# Altium PCB AVR精简学习板.PcbDoc (part 1 of 10)
Units mm, origin at the board's own origin, x right, y up, seen from the top; angles counter-clockwise.
Board outline 152.4 x 101.6 mm, 2 copper layers (Top Layer, Bottom Layer); 44 components, 51 nets, 211 pads, 6 vias.
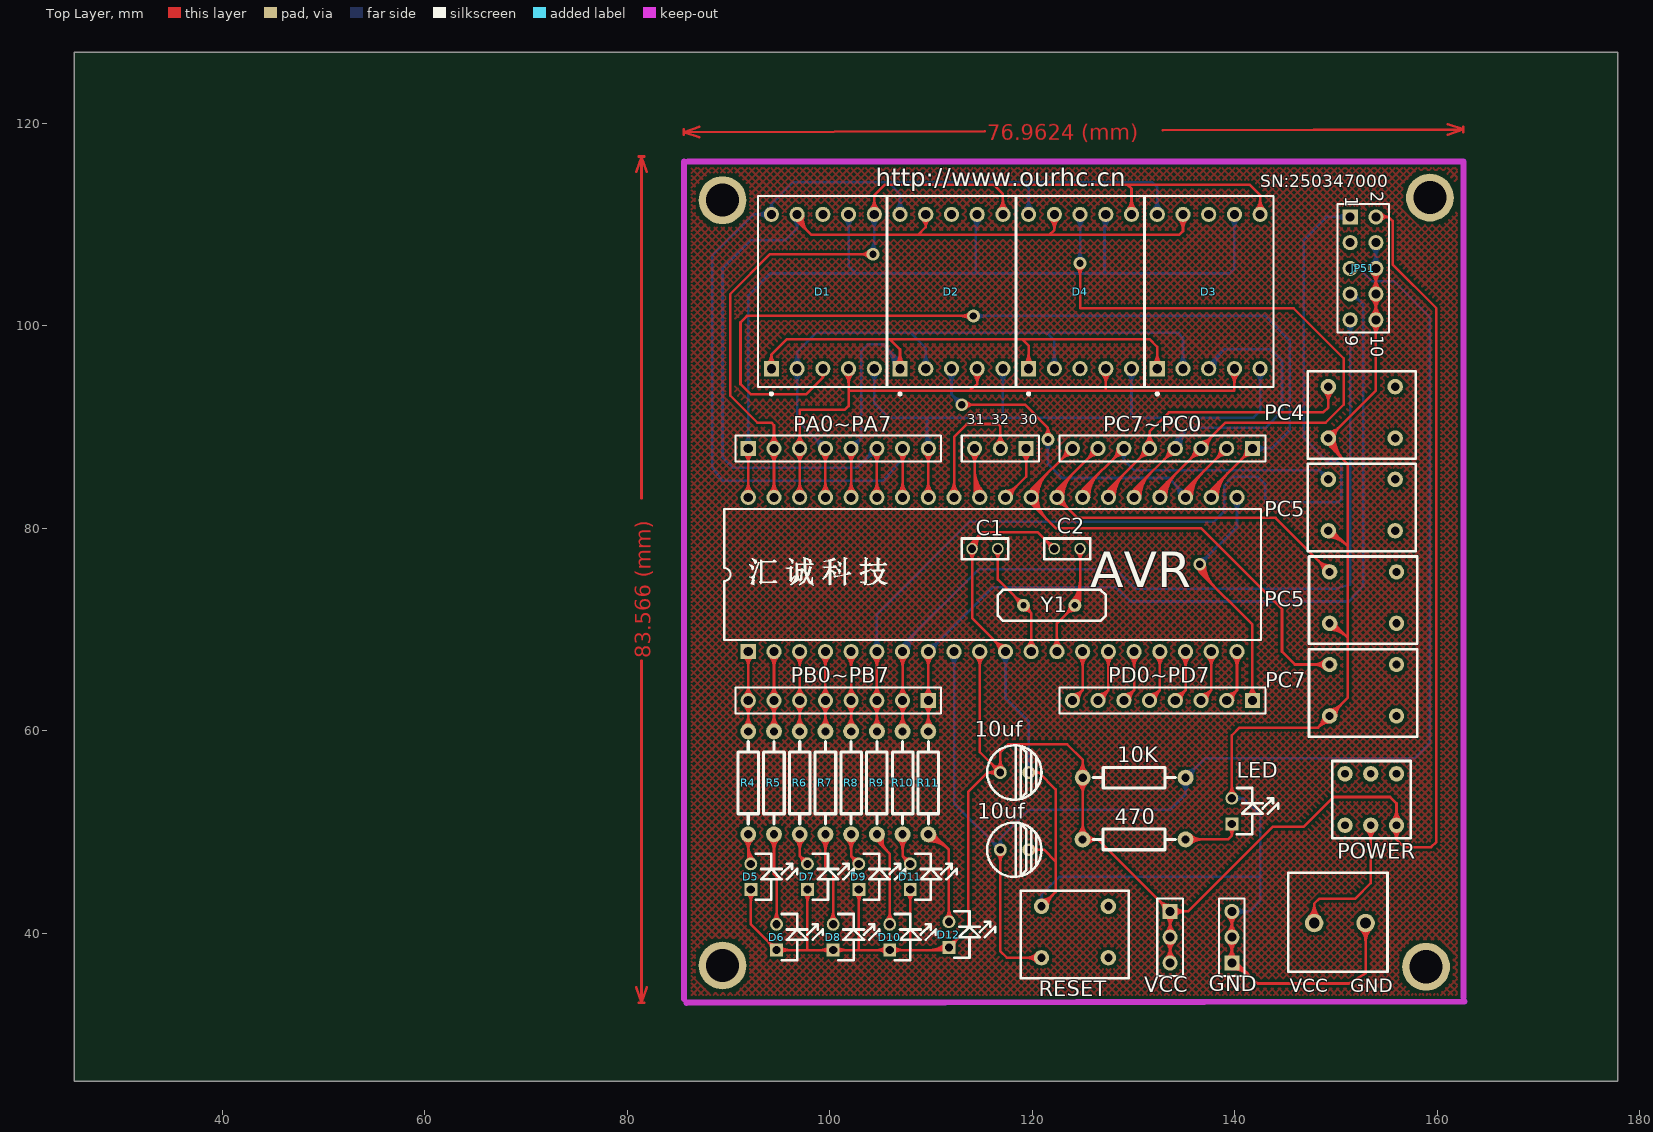
[diagram p0: Top Layer view]
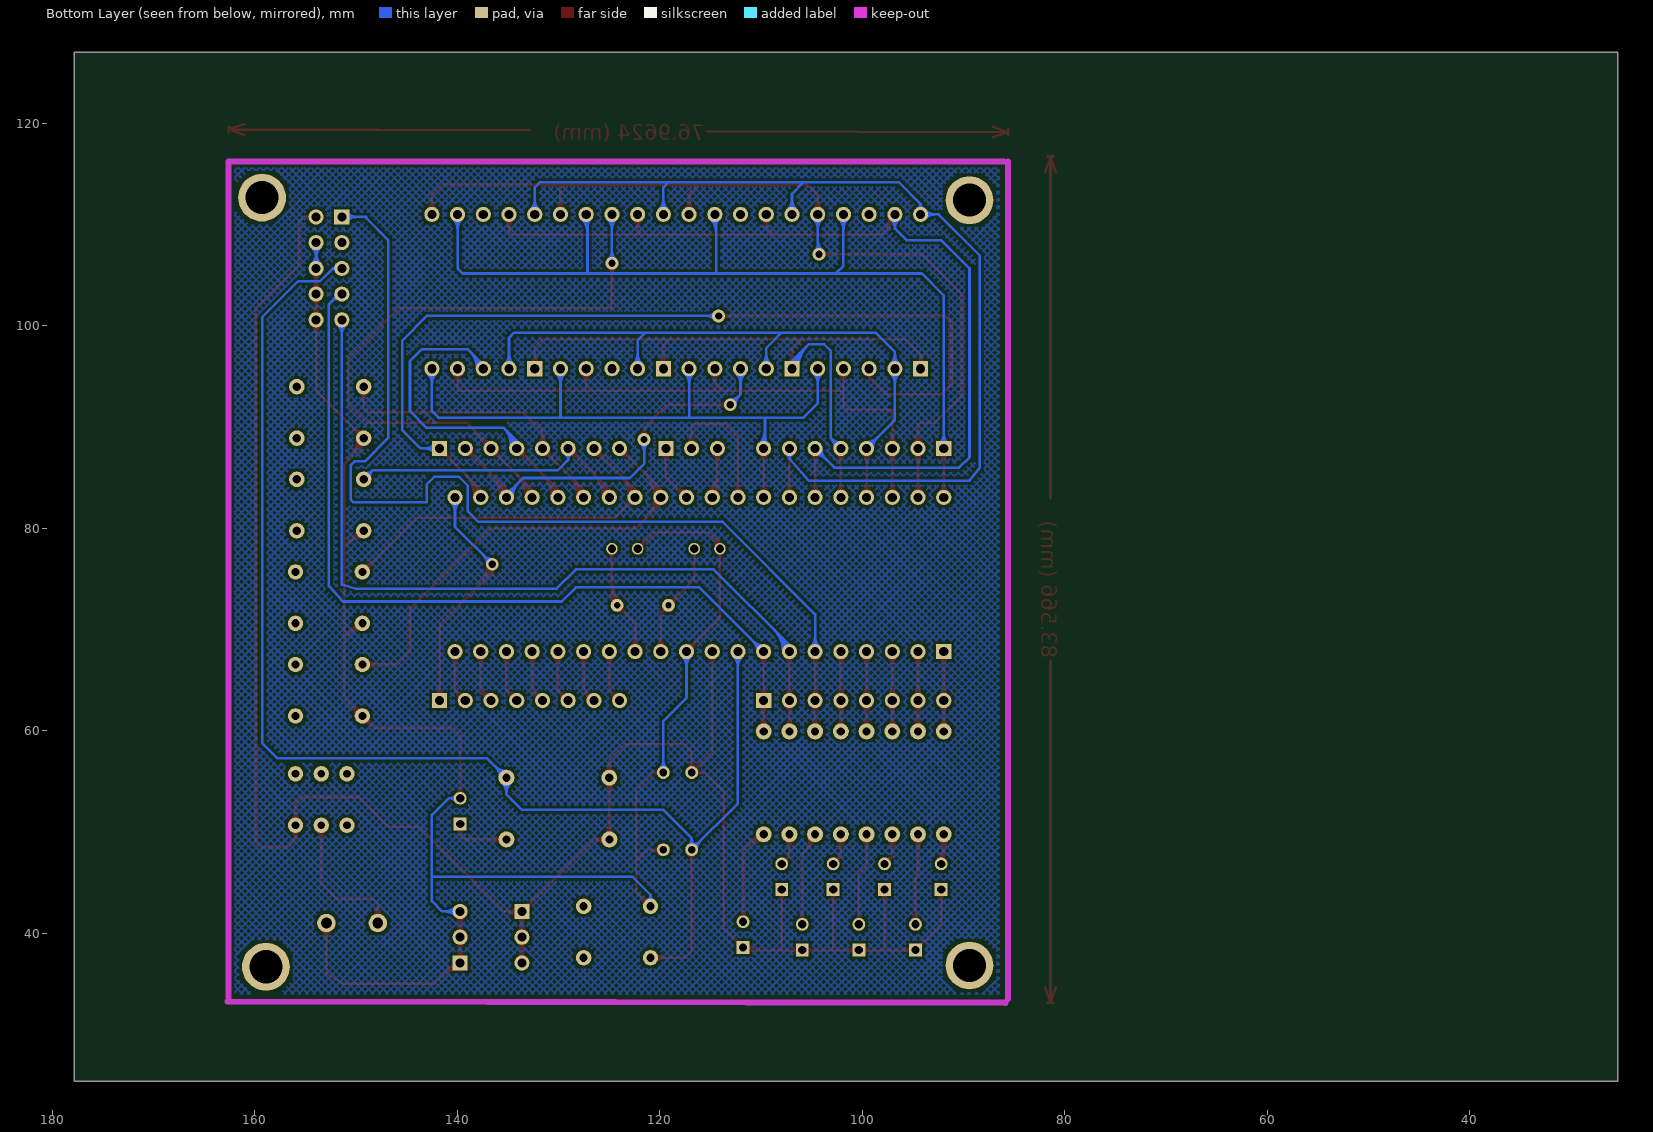
[diagram p1: Bottom Layer view, seen from below]

## Layer stack, top to bottom
Top Layer: signal copper 0.0356
Dielectric: dielectric 0.32, FR-4, Dk 4.8
Bottom Layer: signal copper 0.0356

## Board outline
25.4,25.4 177.8,25.4 177.8,127 25.4,127

## Design rules (kind name [scope] priority, off if disabled: settings)
Clearance [All] p1: gap=0.254
ComponentClearance [All] p1: gap=0.254 collisioncheckmode=0 verticalgap=0.254
PolygonConnect [All] p1: connectstyle=Relief reliefconductorwidth=0.254 reliefentries=4 polygonreliefangle="90 Angle"
RoutingVias [All] p1: holewidth=0.711 width=1.27 viastyle="Through Hole" minholewidth=0.711 minwidth=1.27 maxholewidth=0.711 maxwidth=1.27
SolderMaskExpansion [All] p1: expansion=0.102
TestPointUsage [All] p1: valid=0 allowmultiple=FALSE
Testpoint [All] p1: side=15 testpointundercomponent=TRUE minsize=1.016 maxsize=2.54 preferedsize=1.524 minholesize=0 maxholesize=1.016 preferedholesize=0.813 testpointgrid=0.025 style=1023 order=0-112345678
Width [All] p1: maxlimit=0.254 minlimit=0.254 preferedwidth=0.254
17 further rules are at their usual default settings.

## Classes and differential pairs
component class shumaguan: 10uf 10Uf C1 C2 D1 D2 D3 D4 D5 D6 D7 D8 D9 D10 D11 D12 PC4 PC5 PC7 POWER RESET

## Components (designator, comment, footprint, x,y, rotation, side; value= is the part's Value field where it differs from the comment)
10K "8.2k" AXIAL0.4 135.128,55.372 r180 top (schematic designator R3)
10uf "360u\15v" cap2 112.268,55.88 r0 top (schematic designator C7)
10uf "1uf" cap2 112.268,48.26 r0 top (schematic designator C?)
470 "470" AXIAL0.4 124.968,49.276 r0 top (schematic designator R1)
AVR "ATmega16-16PC" 40P6 116.078,75.438 r0 top (schematic designator U1)
C1 "15p" RAD0.3 117.094,77.978 r180 top
C2 "15p" RAD0.3 121.666,77.978 r0 top
D1 "3" LEDDIP-10/C15.24 99.314,103.378 r0 top
D2 "Dpy Blue-CC" LEDDIP-10/C15.24 112.014,103.378 r0 top
D3 "Dpy Blue-CC" LEDDIP-10/C15.24 137.414,103.378 r0 top
D4 "Dpy Blue-CC" LEDDIP-10/C15.24 124.714,103.378 r0 top
D5 "LED" LED 92.71,46.355 r270 top
D6 "LED" LED 95.25,40.386 r270 top
D7 "LED" LED 98.298,46.355 r270 top
D8 "LED" LED 100.838,40.386 r270 top
D9 "LED" LED 103.378,46.355 r270 top
D10 "LED" LED 106.426,40.386 r270 top
D11 "LED" LED 108.458,46.355 r270 top
D12 "LED" LED 112.268,40.64 r270 top
GND "GND" HDR1X3 139.7,37.084 r90 top (schematic designator JP12)
JP1 "Header 3" HDR1X3 119.38,87.884 r180 top
JP51 "download" HDR2X5 151.384,110.744 r270 top
LED "LED" LED 140.208,52.832 r270 top
PA0~PA7 "Header 8" HDR1X8 91.948,87.884 r0 top (schematic designator JP5)
PB0~PB7 "Header 8" HDR1X8 109.728,62.992 r180 top (schematic designator JP2)
PC4 "KEY" KEY-1 149.225,93.98 r0 top (schematic designator 1)
PC5 "2" KEY-1 149.225,84.836 r0 top (schematic designator 2)
PC5 "KEY" KEY-1 149.352,75.692 r0 top (schematic designator 3)
PC7 "KEY" KEY-1 149.352,66.548 r0 top (schematic designator 4)
PC7~PC0 "Header 8" HDR1X8 141.732,87.884 r180 top (schematic designator JP6)
PD0~PD7 "Header 8" HDR1X8 141.732,62.992 r180 top (schematic designator JP3)
POWER "power" PCBComponent_1 152.4,41.656 r0 top (schematic designator 11)
R4 "470" AXIAL0.4 91.948,49.784 r90 top
R5 "8.2k" AXIAL0.4 94.488,49.784 r90 top
R6 "8.2k" AXIAL0.4 97.028,49.784 r90 top
R7 "8.2k" AXIAL0.4 99.568,49.784 r90 top
R8 "8.2k" AXIAL0.4 102.108,49.784 r90 top
R9 "8.2k" AXIAL0.4 104.648,49.784 r90 top
R10 "8.2k" AXIAL0.4 107.188,49.784 r90 top
R11 "8.2k" AXIAL0.4 109.728,49.784 r90 top
RESET "KEY" KEY-1 120.904,42.672 r0 top (schematic designator 5)
RT "KEY-33" key 153.416,56.388 r90 top
VCC "VCC" HDR1X3 133.604,42.164 r270 top (schematic designator JP11)
Y1 "12M" CRYSTAL 121.666,71.374 r180 top

## Footprints (in the part's own frame and the unit in brackets; to place one, negate y for a bottom-side part, rotate by r counter-clockwise, add the part's x,y. Pads: shape width x height; smd on the part's side, far side on the other; paste and mask are expansions set on the pad)
40P6 [mm] "DIP; 40 Leads; Row Spacing 15.24 mm; Pitch 2.54 mm"
  rect 1.5x1.5 hole 0.9: 1(-24.13,-7.62)
  round 1.5 hole 0.9: 2(-21.59,-7.62) 3(-19.05,-7.62) 4(-16.51,-7.62) 5(-13.97,-7.62) 6(-11.43,-7.62) 7(-8.89,-7.62) 8(-6.35,-7.62) 9(-3.81,-7.62) 10(-1.27,-7.62) 11(1.27,-7.62) 12(3.81,-7.62) 13(6.35,-7.62) 14(8.89,-7.62) 15(11.43,-7.62) 16(13.97,-7.62) 17(16.51,-7.62) 18(19.05,-7.62) 19(21.59,-7.62) 20(24.13,-7.62) 21(24.13,7.62) 22(21.59,7.62) 23(19.05,7.62) 24(16.51,7.62) 25(13.97,7.62) 26(11.43,7.62) 27(8.89,7.62) 28(6.35,7.62) 29(3.81,7.62) 30(1.27,7.62) 31(-1.27,7.62) 32(-3.81,7.62) 33(-6.35,7.62) 34(-8.89,7.62) 35(-11.43,7.62) 36(-13.97,7.62) 37(-16.51,7.62) 38(-19.05,7.62) 39(-21.59,7.62) 40(-24.13,7.62)
  silkscreen extent -26.5,-6.45 26.5,6.45
AXIAL0.4 [mil]
  round 62 hole 32: 1(-0.15,-0.04) 2(399.85,-0.04)
  silkscreen extent 40,-40 360,40
cap2 [mil]
  round 50 hole 30: 1(180,0) 2(290,0)
  silkscreen extent 129,-106 340,106
CRYSTAL [mil] "CRYSTAL"
  round 50 hole 25: 1(-100,-40) 2(100,-40)
  silkscreen extent -220,-100 200,20
HDR1X3 [mm] "Connector; Header; 3 Position"
  rect 1.5x1.5 hole 0.9: 1(0,0)
  round 1.5 hole 0.9: 2(2.54,0) 3(5.08,0)
  silkscreen extent -1.27,-1.27 6.35,1.27
HDR1X8 [mm] "Connector; Header; 8 Position"
  rect 1.5x1.5 hole 0.9: 1(0,0)
  round 1.5 hole 0.9: 2(2.54,0) 3(5.08,0) 4(7.62,0) 5(10.16,0) 6(12.7,0) 7(15.24,0) 8(17.78,0)
  silkscreen extent -1.27,-1.27 19.05,1.27
HDR2X5 [mm] "Connector; Header; 5x2 Position"
  rect 1.5x1.5 hole 0.9: 1(0,0)
  round 1.5 hole 0.9: 2(0,2.54) 3(2.54,0) 4(2.54,2.54) 5(5.08,0) 6(5.08,2.54) 7(7.62,0) 8(7.62,2.54) 9(10.16,0) 10(10.16,2.54)
  silkscreen extent -1.27,-1.27 11.43,3.81
key [mil]
  round 60 hole 30: 0(-225,100) 1(-225,0) 2(-225,-100) 3(-25,-100) 4(-25,0) 5(-25,100)
  silkscreen extent -275,-155 25,150
KEY-1 [mil] "KEY"
  round 60 hole 32: 0(0,0) 1(260,0) 2(0,-200) 3(260,-200)
  silkscreen extent -80,-280 340,60
LED [mil]
  rect 50x50 hole 32: 1(80,-20)
  round 50 hole 32: 2(-20,-20)
  silkscreen extent -60,0 120,160
LEDDIP-10/C15.24 [mm]
  rect 1.5x1.5 hole 0.9: 1(-5.08,-7.62)
  round 1.5 hole 0.9: 2(-2.54,-7.62) 3(0,-7.62) 4(2.54,-7.62) 5(5.08,-7.62) 6(5.08,7.62) 7(2.54,7.62) 8(0,7.62) 9(-2.54,7.62) 10(-5.08,7.62)
  silkscreen extent -6.4,-10.22 6.4,9.45
PCBComponent_1 [mil]
  round 71.81 hole 41.81: 1(-180,-25) 2(20,-25)
  silkscreen extent -280,-215 105,170
RAD0.3 [mil]
  round 45 hole 32: 1(20,0) 2(120,0)
  silkscreen extent -20,-40 160,40

## Part data
10K 470 R4 R5 R6 R7 R8 R9 R10 R11: library part RES2
10uf 10uf: library part "CAPACITOR POL", "Capacitor"
AVR: "8-Bit AVR Microcontroller with 16K Bytes of In-System Programmable Flash Memory"
C1 C2: library part CAP, "Capacitor"
D1: library part "Dpy Blue-CC", "14.2 mm General Purpose Blue 7-Segment Display: CC, RH DP, Gray Surface"
D2 D3 D4: "14.2 mm General Purpose Blue 7-Segment Display: CC, RH DP, Gray Surface"
GND VCC: library part "Header 3", "Header, 3-Pin"
JP1: "Header, 3-Pin"
JP51: library part "Header 5X2", "Header, 5-Pin, Dual row"
PA0~PA7 PB0~PB7 PC7~PC0 PD0~PD7: "Header, 8-Pin"
PC5: library part KEY, "KEY"
Y1: library part CRYSTAL, "Crystal"

## Free pads (board coordinates)
  round 4.72 hole 3.267: 0(89.408,112.395) 1(89.408,36.83) 2(159.258,112.649) 3(158.877,36.703)

## Via types
v1: diameter 1.27, hole 0.711, Top Layer to Bottom Layer, 6 vias

## Nets (pads, with @x,y where several pads share a name; then routed paths per layer and width w, separated by ;. In a path a pad name is that pad's centre, name@x,y a point inside that pad or via, vN(x,y) a via of type N, cw(c..) or ccw(c..) an arc to the next point about the centre after c; other vN are vias at no path point)
D0: AVR.40 D1.7 D2.7 D3.7 D4.7 PA0~PA7.1 | length 271.7
  Top Layer w0.254: AVR.40@91.948,83.058 PA0~PA7.1@91.948,87.884 ; AVR.40@91.507,83.499 ccw(c90.444,84.562) 91.948,84.562 ; AVR.40@91.507,83.499 ccw(c90.444,84.562) 91.948,84.562 ; AVR.40@91.507,83.499 ccw(c90.444,84.562) 91.948,84.562 ; AVR.40@91.507,83.499 ccw(c90.444,84.562) 91.948,84.562 ; AVR.40@91.507,83.499 ccw(c90.444,84.562) 91.948,84.562 ; AVR.40@91.507,83.499 ccw(c90.444,84.562) 91.948,84.562 ; AVR.40@91.507,83.499 ccw(c90.444,84.562) 91.948,84.562 ; PA0~PA7.1@91.507,87.443 cw(c90.444,86.38) 91.948,86.38 ; PA0~PA7.1@91.507,87.443 cw(c90.444,86.38) 91.948,86.38 ; PA0~PA7.1@91.507,87.443 cw(c90.444,86.38) 91.948,86.38 ; PA0~PA7.1@91.507,87.443 cw(c90.444,86.38) 91.948,86.38 ; PA0~PA7.1@91.507,87.443 cw(c90.444,86.38) 91.948,86.38 ; PA0~PA7.1@91.507,87.443 cw(c90.444,86.38) 91.948,86.38 ; PA0~PA7.1@91.507,87.443 cw(c90.444,86.38) 91.948,86.38 ; AVR.40@91.687,83.319 ccw(c91.057,83.949) 91.948,83.949 ; AVR.40@91.687,83.319 ccw(c91.057,83.949) 91.948,83.949 ; AVR.40@91.687,83.319 ccw(c91.057,83.949) 91.948,83.949 ; AVR.40@91.687,83.319 ccw(c91.057,83.949) 91.948,83.949 ; AVR.40@91.687,83.319 ccw(c91.057,83.949) 91.948,83.949 ; AVR.40@91.687,83.319 ccw(c91.057,83.949) 91.948,83.949 ; AVR.40@91.687,83.319 ccw(c91.057,83.949) 91.948,83.949 ; PA0~PA7.1@91.687,87.623 cw(c91.057,86.993) 91.948,86.993 ; PA0~PA7.1@91.687,87.623 cw(c91.057,86.993) 91.948,86.993 ; PA0~PA7.1@91.687,87.623 cw(c91.057,86.993) 91.948,86.993 ; PA0~PA7.1@91.687,87.623 cw(c91.057,86.993) 91.948,86.993 ; PA0~PA7.1@91.687,87.623 cw(c91.057,86.993) 91.948,86.993 ; PA0~PA7.1@91.687,87.623 cw(c91.057,86.993) 91.948,86.993 ; PA0~PA7.1@91.687,87.623 cw(c91.057,86.993) 91.948,86.993 ; 91.948,83.949 ccw(c92.839,83.949) AVR.40@92.209,83.319 ; 91.948,83.949 ccw(c92.839,83.949) AVR.40@92.209,83.319 ; 91.948,83.949 ccw(c92.839,83.949) AVR.40@92.209,83.319 ; 91.948,83.949 ccw(c92.839,83.949) AVR.40@92.209,83.319 ; 91.948,83.949 ccw(c92.839,83.949) AVR.40@92.209,83.319 ; 91.948,83.949 ccw(c92.839,83.949) AVR.40@92.209,83.319 ; 91.948,83.949 ccw(c92.839,83.949) AVR.40@92.209,83.319 ; 91.948,84.562 ccw(c93.452,84.562) AVR.40@92.389,83.499 ; 91.948,84.562 ccw(c93.452,84.562) AVR.40@92.389,83.499 ; 91.948,84.562 ccw(c93.452,84.562) AVR.40@92.389,83.499 ; 91.948,84.562 ccw(c93.452,84.562) AVR.40@92.389,83.499 ; 91.948,84.562 ccw(c93.452,84.562) AVR.40@92.389,83.499 ; 91.948,84.562 ccw(c93.452,84.562) AVR.40@92.389,83.499 ; 91.948,84.562 ccw(c93.452,84.562) AVR.40@92.389,83.499 ; 91.948,86.38 cw(c93.452,86.38) PA0~PA7.1@92.389,87.443 ; 91.948,86.38 cw(c93.452,86.38) PA0~PA7.1@92.389,87.443 ; 91.948,86.38 cw(c93.452,86.38) PA0~PA7.1@92.389,87.443 ; 91.948,86.38 cw(c93.452,86.38) PA0~PA7.1@92.389,87.443 ; 91.948,86.38 cw(c93.452,86.38) PA0~PA7.1@92.389,87.443 ; 91.948,86.38 cw(c93.452,86.38) PA0~PA7.1@92.389,87.443 ; 91.948,86.38 cw(c93.452,86.38) PA0~PA7.1@92.389,87.443 ; 91.948,86.993 cw(c92.839,86.993) PA0~PA7.1@92.209,87.623 ; 91.948,86.993 cw(c92.839,86.993) PA0~PA7.1@92.209,87.623 ; 91.948,86.993 cw(c92.839,86.993) PA0~PA7.1@92.209,87.623 ; 91.948,86.993 cw(c92.839,86.993) PA0~PA7.1@92.209,87.623 ; 91.948,86.993 cw(c92.839,86.993) PA0~PA7.1@92.209,87.623 ; 91.948,86.993 cw(c92.839,86.993) PA0~PA7.1@92.209,87.623 ; 91.948,86.993 cw(c92.839,86.993) PA0~PA7.1@92.209,87.623
  Bottom Layer w0.254: PA0~PA7.1@91.948,87.884 91.948,102.997 94.107,105.156 139.446,105.156 139.954,105.664 D3.7@139.954,110.998 ; D1.7@101.854,110.998 101.854,105.918 102.616,105.156 ; 114.427,105.156 114.427,110.871 D2.7@114.554,110.998 ; 127.127,105.156 D4.7@127.127,111.125 ; PA0~PA7.1@91.507,88.325 ccw(c90.444,89.388) 91.948,89.388 ; PA0~PA7.1@91.507,88.325 ccw(c90.444,89.388) 91.948,89.388 ; PA0~PA7.1@91.507,88.325 ccw(c90.444,89.388) 91.948,89.388 ; PA0~PA7.1@91.507,88.325 ccw(c90.444,89.388) 91.948,89.388 ; PA0~PA7.1@91.507,88.325 ccw(c90.444,89.388) 91.948,89.388 ; PA0~PA7.1@91.507,88.325 ccw(c90.444,89.388) 91.948,89.388 ; PA0~PA7.1@91.507,88.325 ccw(c90.444,89.388) 91.948,89.388 ; PA0~PA7.1@91.687,88.145 ccw(c91.057,88.775) 91.948,88.775 ; PA0~PA7.1@91.687,88.145 ccw(c91.057,88.775) 91.948,88.775 ; PA0~PA7.1@91.687,88.145 ccw(c91.057,88.775) 91.948,88.775 ; PA0~PA7.1@91.687,88.145 ccw(c91.057,88.775) 91.948,88.775 ; PA0~PA7.1@91.687,88.145 ccw(c91.057,88.775) 91.948,88.775 ; PA0~PA7.1@91.687,88.145 ccw(c91.057,88.775) 91.948,88.775 ; PA0~PA7.1@91.687,88.145 ccw(c91.057,88.775) 91.948,88.775 ; 91.948,88.775 ccw(c92.839,88.775) PA0~PA7.1@92.209,88.145 ; 91.948,88.775 ccw(c92.839,88.775) PA0~PA7.1@92.209,88.145 ; 91.948,88.775 ccw(c92.839,88.775) PA0~PA7.1@92.209,88.145 ; 91.948,88.775 ccw(c92.839,88.775) PA0~PA7.1@92.209,88.145 ; 91.948,88.775 ccw(c92.839,88.775) PA0~PA7.1@92.209,88.145 ; 91.948,88.775 ccw(c92.839,88.775) PA0~PA7.1@92.209,88.145 ; 91.948,88.775 ccw(c92.839,88.775) PA0~PA7.1@92.209,88.145 ; 91.948,89.388 ccw(c93.452,89.388) PA0~PA7.1@92.389,88.325 ; 91.948,89.388 ccw(c93.452,89.388) PA0~PA7.1@92.389,88.325 ; 91.948,89.388 ccw(c93.452,89.388) PA0~PA7.1@92.389,88.325 ; 91.948,89.388 ccw(c93.452,89.388) PA0~PA7.1@92.389,88.325 ; 91.948,89.388 ccw(c93.452,89.388) PA0~PA7.1@92.389,88.325 ; 91.948,89.388 ccw(c93.452,89.388) PA0~PA7.1@92.389,88.325 ; 91.948,89.388 ccw(c93.452,89.388) PA0~PA7.1@92.389,88.325 ; D1.7@101.413,110.557 cw(c100.35,109.494) 101.854,109.494 ; D1.7@101.413,110.557 cw(c100.35,109.494) 101.854,109.494 ; D1.7@101.413,110.557 cw(c100.35,109.494) 101.854,109.494 ; D1.7@101.413,110.557 cw(c100.35,109.494) 101.854,109.494 ; D1.7@101.413,110.557 cw(c100.35,109.494) 101.854,109.494 ; D1.7@101.413,110.557 cw(c100.35,109.494) 101.854,109.494 ; D1.7@101.413,110.557 cw(c100.35,109.494) 101.854,109.494 ; D1.7@101.593,110.737 cw(c100.963,110.107) 101.854,110.107 ; D1.7@101.593,110.737 cw(c100.963,110.107) 101.854,110.107 ; D1.7@101.593,110.737 cw(c100.963,110.107) 101.854,110.107 ; D1.7@101.593,110.737 cw(c100.963,110.107) 101.854,110.107 ; D1.7@101.593,110.737 cw(c100.963,110.107) 101.854,110.107 ; D1.7@101.593,110.737 cw(c100.963,110.107) 101.854,110.107 ; D1.7@101.593,110.737 cw(c100.963,110.107) 101.854,110.107 ; 101.854,109.494 cw(c103.358,109.494) D1.7@102.295,110.557 ; 101.854,109.494 cw(c103.358,109.494) D1.7@102.295,110.557 ; 101.854,109.494 cw(c103.358,109.494) D1.7@102.295,110.557 ; 101.854,109.494 cw(c103.358,109.494) D1.7@102.295,110.557 ; 101.854,109.494 cw(c103.358,109.494) D1.7@102.295,110.557 ; 101.854,109.494 cw(c103.358,109.494) D1.7@102.295,110.557 ; 101.854,109.494 cw(c103.358,109.494) D1.7@102.295,110.557 ; 101.854,110.107 cw(c102.745,110.107) D1.7@102.115,110.737 ; 101.854,110.107 cw(c102.745,110.107) D1.7@102.115,110.737 ; 101.854,110.107 cw(c102.745,110.107) D1.7@102.115,110.737 ; 101.854,110.107 cw(c102.745,110.107) D1.7@102.115,110.737 ; 101.854,110.107 cw(c102.745,110.107) D1.7@102.115,110.737 ; 101.854,110.107 cw(c102.745,110.107) D1.7@102.115,110.737 ; 101.854,110.107 cw(c102.745,110.107) D1.7@102.115,110.737 ; D2.7@114.113,110.557 cw(c113.357,109.801) 114.427,109.801 ; D2.7@114.113,110.557 cw(c113.357,109.801) 114.427,109.801 ; D2.7@114.113,110.557 cw(c113.357,109.801) 114.427,109.801 ; D2.7@114.113,110.557 cw(c113.357,109.801) 114.427,109.801 ; D2.7@114.113,110.557 cw(c113.357,109.801) 114.427,109.801 ; D2.7@114.113,110.557 cw(c113.357,109.801) 114.427,109.801 ; D2.7@114.113,110.557 cw(c113.357,109.801) 114.427,109.801 ; 114.427,109.187 cw(c116.365,109.187) D2.7@114.995,110.557 ; 114.427,109.187 cw(c116.365,109.187) D2.7@114.995,110.557 ; 114.427,109.187 cw(c116.365,109.187) D2.7@114.995,110.557 ; 114.427,109.187 cw(c116.365,109.187) D2.7@114.995,110.557 ; 114.427,109.187 cw(c116.365,109.187) D2.7@114.995,110.557 ; 114.427,109.187 cw(c116.365,109.187) D2.7@114.995,110.557 ; 114.427,109.187 cw(c116.365,109.187) D2.7@114.995,110.557 ; 114.427,109.801 cw(c115.751,109.801) D2.7@114.815,110.737 ; 114.427,109.801 cw(c115.751,109.801) D2.7@114.815,110.737 ; 114.427,109.801 cw(c115.751,109.801) D2.7@114.815,110.737 ; 114.427,109.801 cw(c115.751,109.801) D2.7@114.815,110.737 ; 114.427,109.801 cw(c115.751,109.801) D2.7@114.815,110.737 ; 114.427,109.801 cw(c115.751,109.801) D2.7@114.815,110.737 ; 114.427,109.801 cw(c115.751,109.801) D2.7@114.815,110.737 ; D4.7@126.813,110.557 cw(c126.057,109.801) 127.127,109.801 ; D4.7@126.813,110.557 cw(c126.057,109.801) 127.127,109.801 ; D4.7@126.813,110.557 cw(c126.057,109.801) 127.127,109.801 ; D4.7@126.813,110.557 cw(c126.057,109.801) 127.127,109.801 ; D4.7@126.813,110.557 cw(c126.057,109.801) 127.127,109.801 ; D4.7@126.813,110.557 cw(c126.057,109.801) 127.127,109.801 ; D4.7@126.813,110.557 cw(c126.057,109.801) 127.127,109.801 ; 127.127,109.187 cw(c129.065,109.187) D4.7@127.695,110.557 ; 127.127,109.187 cw(c129.065,109.187) D4.7@127.695,110.557 ; 127.127,109.187 cw(c129.065,109.187) D4.7@127.695,110.557 ; 127.127,109.187 cw(c129.065,109.187) D4.7@127.695,110.557 ; 127.127,109.187 cw(c129.065,109.187) D4.7@127.695,110.557 ; 127.127,109.187 cw(c129.065,109.187) D4.7@127.695,110.557 ; 127.127,109.187 cw(c129.065,109.187) D4.7@127.695,110.557 ; 127.127,109.801 cw(c128.451,109.801) D4.7@127.515,110.737 ; 127.127,109.801 cw(c128.451,109.801) D4.7@127.515,110.737 ; 127.127,109.801 cw(c128.451,109.801) D4.7@127.515,110.737 ; 127.127,109.801 cw(c128.451,109.801) D4.7@127.515,110.737 ; 127.127,109.801 cw(c128.451,109.801) D4.7@127.515,110.737 ; 127.127,109.801 cw(c128.451,109.801) D4.7@127.515,110.737 ; 127.127,109.801 cw(c128.451,109.801) D4.7@127.515,110.737 ; D3.7@139.513,110.557 cw(c138.45,109.494) 139.954,109.494 ; D3.7@139.513,110.557 cw(c138.45,109.494) 139.954,109.494 ; D3.7@139.513,110.557 cw(c138.45,109.494) 139.954,109.494 ; D3.7@139.513,110.557 cw(c138.45,109.494) 139.954,109.494 ; D3.7@139.513,110.557 cw(c138.45,109.494) 139.954,109.494 ; D3.7@139.513,110.557 cw(c138.45,109.494) 139.954,109.494 ; D3.7@139.513,110.557 cw(c138.45,109.494) 139.954,109.494 ; D3.7@139.693,110.737 cw(c139.063,110.107) 139.954,110.107 ; D3.7@139.693,110.737 cw(c139.063,110.107) 139.954,110.107 ; D3.7@139.693,110.737 cw(c139.063,110.107) 139.954,110.107 ; D3.7@139.693,110.737 cw(c139.063,110.107) 139.954,110.107 ; D3.7@139.693,110.737 cw(c139.063,110.107) 139.954,110.107 ; D3.7@139.693,110.737 cw(c139.063,110.107) 139.954,110.107 ; D3.7@139.693,110.737 cw(c139.063,110.107) 139.954,110.107 ; 139.954,109.494 cw(c141.458,109.494) D3.7@140.395,110.557 ; 139.954,109.494 cw(c141.458,109.494) D3.7@140.395,110.557 ; 139.954,109.494 cw(c141.458,109.494) D3.7@140.395,110.557 ; 139.954,109.494 cw(c141.458,109.494) D3.7@140.395,110.557 ; 139.954,109.494 cw(c141.458,109.494) D3.7@140.395,110.557 ; 139.954,109.494 cw(c141.458,109.494) D3.7@140.395,110.557 ; 139.954,109.494 cw(c141.458,109.494) D3.7@140.395,110.557 ; 139.954,110.107 cw(c140.845,110.107) D3.7@140.215,110.737 ; 139.954,110.107 cw(c140.845,110.107) D3.7@140.215,110.737 ; 139.954,110.107 cw(c140.845,110.107) D3.7@140.215,110.737 ; 139.954,110.107 cw(c140.845,110.107) D3.7@140.215,110.737 ; 139.954,110.107 cw(c140.845,110.107) D3.7@140.215,110.737 ; 139.954,110.107 cw(c140.845,110.107) D3.7@140.215,110.737 ; 139.954,110.107 cw(c140.845,110.107) D3.7@140.215,110.737
D1: AVR.39 D1.6 D2.6 D3.6 D4.6 PA0~PA7.2 | length 334.9
  Top Layer w0.254: AVR.39@94.488,83.058 94.488,90.17 94.234,90.424 92.837,90.424 90.17,93.091 90.17,103.124 94.107,107.061 v1(104.267,107.061) ; D1.6@104.394,110.998 104.394,112.903 105.41,113.919 141.478,113.919 142.494,112.903 D3.6@142.494,110.998 ; 116.205,113.919 117.094,113.03 D2.6@117.094,110.998 ; 129.413,113.919 129.794,113.538 D4.6@129.794,110.998 ; AVR.39@94.047,83.499 ccw(c92.984,84.562) 94.488,84.562 ; AVR.39@94.047,83.499 ccw(c92.984,84.562) 94.488,84.562 ; AVR.39@94.047,83.499 ccw(c92.984,84.562) 94.488,84.562 ; AVR.39@94.047,83.499 ccw(c92.984,84.562) 94.488,84.562 ; AVR.39@94.047,83.499 ccw(c92.984,84.562) 94.488,84.562 ; AVR.39@94.047,83.499 ccw(c92.984,84.562) 94.488,84.562 ; AVR.39@94.047,83.499 ccw(c92.984,84.562) 94.488,84.562 ; PA0~PA7.2@94.047,87.443 cw(c92.984,86.38) 94.488,86.38 ; PA0~PA7.2@94.047,87.443 cw(c92.984,86.38) 94.488,86.38 ; PA0~PA7.2@94.047,87.443 cw(c92.984,86.38) 94.488,86.38 ; PA0~PA7.2@94.047,87.443 cw(c92.984,86.38) 94.488,86.38 ; PA0~PA7.2@94.047,87.443 cw(c92.984,86.38) 94.488,86.38 ; PA0~PA7.2@94.047,87.443 cw(c92.984,86.38) 94.488,86.38 ; PA0~PA7.2@94.047,87.443 cw(c92.984,86.38) 94.488,86.38 ; PA0~PA7.2@94.047,88.325 ccw(c92.984,89.388) 94.488,89.388 ; PA0~PA7.2@94.047,88.325 ccw(c92.984,89.388) 94.488,89.388 ; PA0~PA7.2@94.047,88.325 ccw(c92.984,89.388) 94.488,89.388 ; PA0~PA7.2@94.047,88.325 ccw(c92.984,89.388) 94.488,89.388 ; PA0~PA7.2@94.047,88.325 ccw(c92.984,89.388) 94.488,89.388 ; PA0~PA7.2@94.047,88.325 ccw(c92.984,89.388) 94.488,89.388 ; PA0~PA7.2@94.047,88.325 ccw(c92.984,89.388) 94.488,89.388 ; AVR.39@94.227,83.319 ccw(c93.597,83.949) 94.488,83.949 ; AVR.39@94.227,83.319 ccw(c93.597,83.949) 94.488,83.949 ; AVR.39@94.227,83.319 ccw(c93.597,83.949) 94.488,83.949 ; AVR.39@94.227,83.319 ccw(c93.597,83.949) 94.488,83.949 ; AVR.39@94.227,83.319 ccw(c93.597,83.949) 94.488,83.949 ; AVR.39@94.227,83.319 ccw(c93.597,83.949) 94.488,83.949 ; AVR.39@94.227,83.319 ccw(c93.597,83.949) 94.488,83.949 ; PA0~PA7.2@94.227,87.623 cw(c93.597,86.993) 94.488,86.993 ; PA0~PA7.2@94.227,87.623 cw(c93.597,86.993) 94.488,86.993 ; PA0~PA7.2@94.227,87.623 cw(c93.597,86.993) 94.488,86.993 ; PA0~PA7.2@94.227,87.623 cw(c93.597,86.993) 94.488,86.993 ; PA0~PA7.2@94.227,87.623 cw(c93.597,86.993) 94.488,86.993 ; PA0~PA7.2@94.227,87.623 cw(c93.597,86.993) 94.488,86.993 ; PA0~PA7.2@94.227,87.623 cw(c93.597,86.993) 94.488,86.993 ; PA0~PA7.2@94.227,88.145 ccw(c93.597,88.775) 94.488,88.775 ; PA0~PA7.2@94.227,88.145 ccw(c93.597,88.775) 94.488,88.775 ; PA0~PA7.2@94.227,88.145 ccw(c93.597,88.775) 94.488,88.775 ; PA0~PA7.2@94.227,88.145 ccw(c93.597,88.775) 94.488,88.775 ; PA0~PA7.2@94.227,88.145 ccw(c93.597,88.775) 94.488,88.775 ; PA0~PA7.2@94.227,88.145 ccw(c93.597,88.775) 94.488,88.775 ; PA0~PA7.2@94.227,88.145 ccw(c93.597,88.775) 94.488,88.775 ; 94.488,83.949 ccw(c95.379,83.949) AVR.39@94.749,83.319 ; 94.488,83.949 ccw(c95.379,83.949) AVR.39@94.749,83.319 ; 94.488,83.949 ccw(c95.379,83.949) AVR.39@94.749,83.319 ; 94.488,83.949 ccw(c95.379,83.949) AVR.39@94.749,83.319 ; 94.488,83.949 ccw(c95.379,83.949) AVR.39@94.749,83.319 ; 94.488,83.949 ccw(c95.379,83.949) AVR.39@94.749,83.319 ; 94.488,83.949 ccw(c95.379,83.949) AVR.39@94.749,83.319 ; 94.488,84.562 ccw(c95.992,84.562) AVR.39@94.929,83.499 ; 94.488,84.562 ccw(c95.992,84.562) AVR.39@94.929,83.499 ; 94.488,84.562 ccw(c95.992,84.562) AVR.39@94.929,83.499 ; 94.488,84.562 ccw(c95.992,84.562) AVR.39@94.929,83.499 ; 94.488,84.562 ccw(c95.992,84.562) AVR.39@94.929,83.499 ; 94.488,84.562 ccw(c95.992,84.562) AVR.39@94.929,83.499 ; 94.488,84.562 ccw(c95.992,84.562) AVR.39@94.929,83.499 ; 94.488,86.38 cw(c95.992,86.38) PA0~PA7.2@94.929,87.443 ; 94.488,86.38 cw(c95.992,86.38) PA0~PA7.2@94.929,87.443 ; 94.488,86.38 cw(c95.992,86.38) PA0~PA7.2@94.929,87.443 ; 94.488,86.38 cw(c95.992,86.38) PA0~PA7.2@94.929,87.443 ; 94.488,86.38 cw(c95.992,86.38) PA0~PA7.2@94.929,87.443 ; 94.488,86.38 cw(c95.992,86.38) PA0~PA7.2@94.929,87.443 ; 94.488,86.38 cw(c95.992,86.38) PA0~PA7.2@94.929,87.443 ; 94.488,86.993 cw(c95.379,86.993) PA0~PA7.2@94.749,87.623 ; 94.488,86.993 cw(c95.379,86.993) PA0~PA7.2@94.749,87.623 ; 94.488,86.993 cw(c95.379,86.993) PA0~PA7.2@94.749,87.623 ; 94.488,86.993 cw(c95.379,86.993) PA0~PA7.2@94.749,87.623 ; 94.488,86.993 cw(c95.379,86.993) PA0~PA7.2@94.749,87.623 ; 94.488,86.993 cw(c95.379,86.993) PA0~PA7.2@94.749,87.623 ; 94.488,86.993 cw(c95.379,86.993) PA0~PA7.2@94.749,87.623 ; 94.488,88.775 ccw(c95.379,88.775) PA0~PA7.2@94.749,88.145 ; 94.488,88.775 ccw(c95.379,88.775) PA0~PA7.2@94.749,88.145 ; 94.488,88.775 ccw(c95.379,88.775) PA0~PA7.2@94.749,88.145 ; 94.488,88.775 ccw(c95.379,88.775) PA0~PA7.2@94.749,88.145 ; 94.488,88.775 ccw(c95.379,88.775) PA0~PA7.2@94.749,88.145 ; 94.488,88.775 ccw(c95.379,88.775) PA0~PA7.2@94.749,88.145 ; 94.488,88.775 ccw(c95.379,88.775) PA0~PA7.2@94.749,88.145 ; 94.488,89.388 ccw(c95.992,89.388) PA0~PA7.2@94.929,88.325 ; 94.488,89.388 ccw(c95.992,89.388) PA0~PA7.2@94.929,88.325 ; 94.488,89.388 ccw(c95.992,89.388) PA0~PA7.2@94.929,88.325 ; 94.488,89.388 ccw(c95.992,89.388) PA0~PA7.2@94.929,88.325 ; 94.488,89.388 ccw(c95.992,89.388) PA0~PA7.2@94.929,88.325 ; 94.488,89.388 ccw(c95.992,89.388) PA0~PA7.2@94.929,88.325 ; 94.488,89.388 ccw(c95.992,89.388) PA0~PA7.2@94.929,88.325 ; 103.041,107.061 cw(c103.041,105.835) v1@103.908,106.702 ; 103.041,107.061 ccw(c103.041,108.287) v1@103.908,107.42 ; 103.041,107.061 cw(c103.041,105.835) v1@103.908,106.702 ; 103.041,107.061 ccw(c103.041,108.287) v1@103.908,107.42 ; 103.041,107.061 ccw(c103.041,108.287) v1@103.908,107.42 ; 103.041,107.061 cw(c103.041,105.835) v1@103.908,106.702 ; 103.041,107.061 ccw(c103.041,108.287) v1@103.908,107.42 ; 103.041,107.061 cw(c103.041,105.835) v1@103.908,106.702 ; 103.041,107.061 ccw(c103.041,108.287) v1@103.908,107.42 ; 103.041,107.061 cw(c103.041,105.835) v1@103.908,106.702 ; 103.041,107.061 ccw(c103.041,108.287) v1@103.908,107.42 ; 103.041,107.061 cw(c103.041,105.835) v1@103.908,106.702 ; 103.041,107.061 ccw(c103.041,108.287) v1@103.908,107.42 ; 103.041,107.061 cw(c103.041,105.835) v1@103.908,106.702 ; D1.6@103.953,111.439 ccw(c102.89,112.502) 104.394,112.502 ; D1.6@103.953,111.439 ccw(c102.89,112.502) 104.394,112.502 ; D1.6@103.953,111.439 ccw(c102.89,112.502) 104.394,112.502 ; D1.6@103.953,111.439 ccw(c102.89,112.502) 104.394,112.502 ; D1.6@103.953,111.439 ccw(c102.89,112.502) 104.394,112.502 ; D1.6@103.953,111.439 ccw(c102.89,112.502) 104.394,112.502 ; D1.6@103.953,111.439 ccw(c102.89,112.502) 104.394,112.502 ; D1.6@104.133,111.259 ccw(c103.503,111.889) 104.394,111.889 ; D1.6@104.133,111.259 ccw(c103.503,111.889) 104.394,111.889 ; D1.6@104.133,111.259 ccw(c103.503,111.889) 104.394,111.889 ; D1.6@104.133,111.259 ccw(c103.503,111.889) 104.394,111.889 ; D1.6@104.133,111.259 ccw(c103.503,111.889) 104.394,111.889 ; D1.6@104.133,111.259 ccw(c103.503,111.889) 104.394,111.889 ; D1.6@104.133,111.259 ccw(c103.503,111.889) 104.394,111.889 ; 104.394,111.889 ccw(c105.285,111.889) D1.6@104.655,111.259 ; 104.394,111.889 ccw(c105.285,111.889) D1.6@104.655,111.259 ; 104.394,111.889 ccw(c105.285,111.889) D1.6@104.655,111.259 ; 104.394,111.889 ccw(c105.285,111.889) D1.6@104.655,111.259 ; 104.394,111.889 ccw(c105.285,111.889) D1.6@104.655,111.259 ; 104.394,111.889 ccw(c105.285,111.889) D1.6@104.655,111.259 ; 104.394,111.889 ccw(c105.285,111.889) D1.6@104.655,111.259 ; 104.394,112.502 ccw(c105.898,112.502) D1.6@104.835,111.439 ; 104.394,112.502 ccw(c105.898,112.502) D1.6@104.835,111.439 ; 104.394,112.502 ccw(c105.898,112.502) D1.6@104.835,111.439 ; 104.394,112.502 ccw(c105.898,112.502) D1.6@104.835,111.439 ; 104.394,112.502 ccw(c105.898,112.502) D1.6@104.835,111.439 ; 104.394,112.502 ccw(c105.898,112.502) D1.6@104.835,111.439 ; 104.394,112.502 ccw(c105.898,112.502) D1.6@104.835,111.439 ; D2.6@116.653,111.439 ccw(c115.59,112.502) 117.094,112.502 ; D2.6@116.653,111.439 ccw(c115.59,112.502) 117.094,112.502 ; D2.6@116.653,111.439 ccw(c115.59,112.502) 117.094,112.502 ; D2.6@116.653,111.439 ccw(c115.59,112.502) 117.094,112.502 ; D2.6@116.653,111.439 ccw(c115.59,112.502) 117.094,112.502 ; D2.6@116.653,111.439 ccw(c115.59,112.502) 117.094,112.502 ; D2.6@116.653,111.439 ccw(c115.59,112.502) 117.094,112.502 ; D2.6@116.833,111.259 ccw(c116.203,111.889) 117.094,111.889 ; D2.6@116.833,111.259 ccw(c116.203,111.889) 117.094,111.889 ; D2.6@116.833,111.259 ccw(c116.203,111.889) 117.094,111.889 ; D2.6@116.833,111.259 ccw(c116.203,111.889) 117.094,111.889 ; D2.6@116.833,111.259 ccw(c116.203,111.889) 117.094,111.889 ; D2.6@116.833,111.259 ccw(c116.203,111.889) 117.094,111.889 ; D2.6@116.833,111.259 ccw(c116.203,111.889) 117.094,111.889 ; 117.094,111.889 ccw(c117.985,111.889) D2.6@117.355,111.259 ; 117.094,111.889 ccw(c117.985,111.889) D2.6@117.355,111.259 ; 117.094,111.889 ccw(c117.985,111.889) D2.6@117.355,111.259 ; 117.094,111.889 ccw(c117.985,111.889) D2.6@117.355,111.259 ; 117.094,111.889 ccw(c117.985,111.889) D2.6@117.355,111.259 ; 117.094,111.889 ccw(c117.985,111.889) D2.6@117.355,111.259 ; 117.094,111.889 ccw(c117.985,111.889) D2.6@117.355,111.259 ; 117.094,112.502 ccw(c118.598,112.502) D2.6@117.535,111.439 ; 117.094,112.502 ccw(c118.598,112.502) D2.6@117.535,111.439 ; 117.094,112.502 ccw(c118.598,112.502) D2.6@117.535,111.439 ; 117.094,112.502 ccw(c118.598,112.502) D2.6@117.535,111.439 ; 117.094,112.502 ccw(c118.598,112.502) D2.6@117.535,111.439 ; 117.094,112.502 ccw(c118.598,112.502) D2.6@117.535,111.439 ; 117.094,112.502 ccw(c118.598,112.502) D2.6@117.535,111.439 ; D4.6@129.353,111.439 ccw(c128.29,112.502) 129.794,112.502 ; D4.6@129.353,111.439 ccw(c128.29,112.502) 129.794,112.502 ; D4.6@129.353,111.439 ccw(c128.29,112.502) 129.794,112.502 ; D4.6@129.353,111.439 ccw(c128.29,112.502) 129.794,112.502 ; D4.6@129.353,111.439 ccw(c128.29,112.502) 129.794,112.502 ; D4.6@129.353,111.439 ccw(c128.29,112.502) 129.794,112.502 ; D4.6@129.353,111.439 ccw(c128.29,112.502) 129.794,112.502 ; D4.6@129.533,111.259 ccw(c128.903,111.889) 129.794,111.889 ; D4.6@129.533,111.259 ccw(c128.903,111.889) 129.794,111.889 ; D4.6@129.533,111.259 ccw(c128.903,111.889) 129.794,111.889 ; D4.6@129.533,111.259 ccw(c128.903,111.889) 129.794,111.889 ; D4.6@129.533,111.259 ccw(c128.903,111.889) 129.794,111.889 ; D4.6@129.533,111.259 ccw(c128.903,111.889) 129.794,111.889 ; D4.6@129.533,111.259 ccw(c128.903,111.889) 129.794,111.889 ; 129.794,111.889 ccw(c130.685,111.889) D4.6@130.055,111.259 ; 129.794,111.889 ccw(c130.685,111.889) D4.6@130.055,111.259 ; 129.794,111.889 ccw(c130.685,111.889) D4.6@130.055,111.259 ; 129.794,111.889 ccw(c130.685,111.889) D4.6@130.055,111.259 ; 129.794,111.889 ccw(c130.685,111.889) D4.6@130.055,111.259 ; 129.794,111.889 ccw(c130.685,111.889) D4.6@130.055,111.259 ; 129.794,111.889 ccw(c130.685,111.889) D4.6@130.055,111.259 ; 129.794,112.502 ccw(c131.298,112.502) D4.6@130.235,111.439 ; 129.794,112.502 ccw(c131.298,112.502) D4.6@130.235,111.439 ; 129.794,112.502 ccw(c131.298,112.502) D4.6@130.235,111.439 ; 129.794,112.502 ccw(c131.298,112.502) D4.6@130.235,111.439 ; 129.794,112.502 ccw(c131.298,112.502) D4.6@130.235,111.439 ; 129.794,112.502 ccw(c131.298,112.502) D4.6@130.235,111.439 ; 129.794,112.502 ccw(c131.298,112.502) D4.6@130.235,111.439 ; D3.6@142.053,111.439 ccw(c140.99,112.502) 142.494,112.502 ; D3.6@142.053,111.439 ccw(c140.99,112.502) 142.494,112.502 ; D3.6@142.053,111.439 ccw(c140.99,112.502) 142.494,112.502 ; D3.6@142.053,111.439 ccw(c140.99,112.502) 142.494,112.502 ; D3.6@142.053,111.439 ccw(c140.99,112.502) 142.494,112.502 ; D3.6@142.053,111.439 ccw(c140.99,112.502) 142.494,112.502 ; D3.6@142.053,111.439 ccw(c140.99,112.502) 142.494,112.502 ; D3.6@142.233,111.259 ccw(c141.603,111.889) 142.494,111.889 ; D3.6@142.233,111.259 ccw(c141.603,111.889) 142.494,111.889 ; D3.6@142.233,111.259 ccw(c141.603,111.889) 142.494,111.889 ; D3.6@142.233,111.259 ccw(c141.603,111.889) 142.494,111.889 ; D3.6@142.233,111.259 ccw(c141.603,111.889) 142.494,111.889 ; D3.6@142.233,111.259 ccw(c141.603,111.889) 142.494,111.889 ; D3.6@142.233,111.259 ccw(c141.603,111.889) 142.494,111.889 ; 142.494,111.889 ccw(c143.385,111.889) D3.6@142.755,111.259 ; 142.494,111.889 ccw(c143.385,111.889) D3.6@142.755,111.259 ; 142.494,111.889 ccw(c143.385,111.889) D3.6@142.755,111.259 ; 142.494,111.889 ccw(c143.385,111.889) D3.6@142.755,111.259 ; 142.494,111.889 ccw(c143.385,111.889) D3.6@142.755,111.259 ; 142.494,111.889 ccw(c143.385,111.889) D3.6@142.755,111.259 ; 142.494,111.889 ccw(c143.385,111.889) D3.6@142.755,111.259 ; 142.494,112.502 ccw(c143.998,112.502) D3.6@142.935,111.439 ; 142.494,112.502 ccw(c143.998,112.502) D3.6@142.935,111.439 ; 142.494,112.502 ccw(c143.998,112.502) D3.6@142.935,111.439 ; 142.494,112.502 ccw(c143.998,112.502) D3.6@142.935,111.439 ; 142.494,112.502 ccw(c143.998,112.502) D3.6@142.935,111.439 ; 142.494,112.502 ccw(c143.998,112.502) D3.6@142.935,111.439 ; 142.494,112.502 ccw(c143.998,112.502) D3.6@142.935,111.439
  Bottom Layer w0.254: v1(104.267,107.061) 104.394,107.188 D1.6@104.394,110.998 ; v1@103.908,107.42 ccw(c102.734,108.594) 104.394,108.594 ; v1@103.908,107.42 ccw(c102.734,108.594) 104.394,108.594 ; v1@103.908,107.42 ccw(c102.734,108.594) 104.394,108.594 ; v1@103.908,107.42 ccw(c102.734,108.594) 104.394,108.594 ; v1@103.908,107.42 ccw(c102.734,108.594) 104.394,108.594 ; v1@103.908,107.42 ccw(c102.734,108.594) 104.394,108.594 ; v1@103.908,107.42 ccw(c102.734,108.594) 104.394,108.594 ; D1.6@103.953,110.557 cw(c102.89,109.494) 104.394,109.494 ; D1.6@103.953,110.557 cw(c102.89,109.494) 104.394,109.494 ; D1.6@103.953,110.557 cw(c102.89,109.494) 104.394,109.494 ; D1.6@103.953,110.557 cw(c102.89,109.494) 104.394,109.494 ; D1.6@103.953,110.557 cw(c102.89,109.494) 104.394,109.494 ; D1.6@103.953,110.557 cw(c102.89,109.494) 104.394,109.494 ; D1.6@103.953,110.557 cw(c102.89,109.494) 104.394,109.494 ; v1@104.087,107.241 ccw(c103.347,107.981) 104.394,107.981 ; v1@104.087,107.241 ccw(c103.347,107.981) 104.394,107.981 ; v1@104.087,107.241 ccw(c103.347,107.981) 104.394,107.981 ; v1@104.087,107.241 ccw(c103.347,107.981) 104.394,107.981 ; v1@104.087,107.241 ccw(c103.347,107.981) 104.394,107.981 ; v1@104.087,107.241 ccw(c103.347,107.981) 104.394,107.981 ; v1@104.087,107.241 ccw(c103.347,107.981) 104.394,107.981 ; D1.6@104.133,110.737 cw(c103.503,110.107) 104.394,110.107 ; D1.6@104.133,110.737 cw(c103.503,110.107) 104.394,110.107 ; D1.6@104.133,110.737 cw(c103.503,110.107) 104.394,110.107 ; D1.6@104.133,110.737 cw(c103.503,110.107) 104.394,110.107 ; D1.6@104.133,110.737 cw(c103.503,110.107) 104.394,110.107 ; D1.6@104.133,110.737 cw(c103.503,110.107) 104.394,110.107 ; D1.6@104.133,110.737 cw(c103.503,110.107) 104.394,110.107 ; 104.394,107.981 ccw(c105.187,107.981) v1@104.626,107.42 ; 104.394,107.981 ccw(c105.187,107.981) v1@104.626,107.42 ; 104.394,107.981 ccw(c105.187,107.981) v1@104.626,107.42 ; 104.394,107.981 ccw(c105.187,107.981) v1@104.626,107.42 ; 104.394,107.981 ccw(c105.187,107.981) v1@104.626,107.42 ; 104.394,107.981 ccw(c105.187,107.981) v1@104.626,107.42 ; 104.394,107.981 ccw(c105.187,107.981) v1@104.626,107.42 ; 104.394,109.494 cw(c105.898,109.494) D1.6@104.835,110.557 ; 104.394,109.494 cw(c105.898,109.494) D1.6@104.835,110.557 ; 104.394,109.494 cw(c105.898,109.494) D1.6@104.835,110.557 ; 104.394,109.494 cw(c105.898,109.494) D1.6@104.835,110.557 ; 104.394,109.494 cw(c105.898,109.494) D1.6@104.835,110.557 ; 104.394,109.494 cw(c105.898,109.494) D1.6@104.835,110.557 ; 104.394,109.494 cw(c105.898,109.494) D1.6@104.835,110.557 ; 104.394,110.107 cw(c105.285,110.107) D1.6@104.655,110.737 ; 104.394,110.107 cw(c105.285,110.107) D1.6@104.655,110.737 ; 104.394,110.107 cw(c105.285,110.107) D1.6@104.655,110.737 ; 104.394,110.107 cw(c105.285,110.107) D1.6@104.655,110.737 ; 104.394,110.107 cw(c105.285,110.107) D1.6@104.655,110.737 ; 104.394,110.107 cw(c105.285,110.107) D1.6@104.655,110.737 ; 104.394,110.107 cw(c105.285,110.107) D1.6@104.655,110.737
D2: AVR.38 D1.4 D2.4 D3.4 D4.4 PA0~PA7.3 | length 246.4
  Top Layer w0.254: AVR.38@97.028,83.058 97.028,91.694 101.473,91.694 101.854,92.075 D1.4@101.854,95.758 ; 101.854,93.726 101.981,93.599 139.954,93.599 D3.4@139.954,95.758 ; 113.919,93.726 114.554,94.234 D2.4@114.554,95.758 ; 127.254,93.599 D4.4@127.254,95.758 ; AVR.38@96.587,83.499 ccw(c95.524,84.562) 97.028,84.562 ; AVR.38@96.587,83.499 ccw(c95.524,84.562) 97.028,84.562 ; AVR.38@96.587,83.499 ccw(c95.524,84.562) 97.028,84.562 ; AVR.38@96.587,83.499 ccw(c95.524,84.562) 97.028,84.562 ; AVR.38@96.587,83.499 ccw(c95.524,84.562) 97.028,84.562 ; AVR.38@96.587,83.499 ccw(c95.524,84.562) 97.028,84.562 ; AVR.38@96.587,83.499 ccw(c95.524,84.562) 97.028,84.562 ; PA0~PA7.3@96.587,87.443 cw(c95.524,86.38) 97.028,86.38 ; PA0~PA7.3@96.587,87.443 cw(c95.524,86.38) 97.028,86.38 ; PA0~PA7.3@96.587,87.443 cw(c95.524,86.38) 97.028,86.38 ; PA0~PA7.3@96.587,87.443 cw(c95.524,86.38) 97.028,86.38 ; PA0~PA7.3@96.587,87.443 cw(c95.524,86.38) 97.028,86.38 ; PA0~PA7.3@96.587,87.443 cw(c95.524,86.38) 97.028,86.38 ; PA0~PA7.3@96.587,87.443 cw(c95.524,86.38) 97.028,86.38 ; PA0~PA7.3@96.587,88.325 ccw(c95.524,89.388) 97.028,89.388 ; PA0~PA7.3@96.587,88.325 ccw(c95.524,89.388) 97.028,89.388 ; PA0~PA7.3@96.587,88.325 ccw(c95.524,89.388) 97.028,89.388 ; PA0~PA7.3@96.587,88.325 ccw(c95.524,89.388) 97.028,89.388 ; PA0~PA7.3@96.587,88.325 ccw(c95.524,89.388) 97.028,89.388 ; PA0~PA7.3@96.587,88.325 ccw(c95.524,89.388) 97.028,89.388 ; PA0~PA7.3@96.587,88.325 ccw(c95.524,89.388) 97.028,89.388 ; AVR.38@96.767,83.319 ccw(c96.137,83.949) 97.028,83.949 ; AVR.38@96.767,83.319 ccw(c96.137,83.949) 97.028,83.949 ; AVR.38@96.767,83.319 ccw(c96.137,83.949) 97.028,83.949 ; AVR.38@96.767,83.319 ccw(c96.137,83.949) 97.028,83.949 ; AVR.38@96.767,83.319 ccw(c96.137,83.949) 97.028,83.949 ; AVR.38@96.767,83.319 ccw(c96.137,83.949) 97.028,83.949 ; AVR.38@96.767,83.319 ccw(c96.137,83.949) 97.028,83.949 ; PA0~PA7.3@96.767,87.623 cw(c96.137,86.993) 97.028,86.993 ; PA0~PA7.3@96.767,87.623 cw(c96.137,86.993) 97.028,86.993 ; PA0~PA7.3@96.767,87.623 cw(c96.137,86.993) 97.028,86.993 ; PA0~PA7.3@96.767,87.623 cw(c96.137,86.993) 97.028,86.993 ; PA0~PA7.3@96.767,87.623 cw(c96.137,86.993) 97.028,86.993 ; PA0~PA7.3@96.767,87.623 cw(c96.137,86.993) 97.028,86.993 ; PA0~PA7.3@96.767,87.623 cw(c96.137,86.993) 97.028,86.993 ; PA0~PA7.3@96.767,88.145 ccw(c96.137,88.775) 97.028,88.775 ; PA0~PA7.3@96.767,88.145 ccw(c96.137,88.775) 97.028,88.775 ; PA0~PA7.3@96.767,88.145 ccw(c96.137,88.775) 97.028,88.775 ; PA0~PA7.3@96.767,88.145 ccw(c96.137,88.775) 97.028,88.775 ; PA0~PA7.3@96.767,88.145 ccw(c96.137,88.775) 97.028,88.775 ; PA0~PA7.3@96.767,88.145 ccw(c96.137,88.775) 97.028,88.775 ; PA0~PA7.3@96.767,88.145 ccw(c96.137,88.775) 97.028,88.775 ; 97.028,83.949 ccw(c97.919,83.949) AVR.38@97.289,83.319 ; 97.028,83.949 ccw(c97.919,83.949) AVR.38@97.289,83.319 ; 97.028,83.949 ccw(c97.919,83.949) AVR.38@97.289,83.319 ; 97.028,83.949 ccw(c97.919,83.949) AVR.38@97.289,83.319 ; 97.028,83.949 ccw(c97.919,83.949) AVR.38@97.289,83.319 ; 97.028,83.949 ccw(c97.919,83.949) AVR.38@97.289,83.319 ; 97.028,83.949 ccw(c97.919,83.949) AVR.38@97.289,83.319 ; 97.028,84.562 ccw(c98.532,84.562) AVR.38@97.469,83.499 ; 97.028,84.562 ccw(c98.532,84.562) AVR.38@97.469,83.499 ; 97.028,84.562 ccw(c98.532,84.562) AVR.38@97.469,83.499 ; 97.028,84.562 ccw(c98.532,84.562) AVR.38@97.469,83.499 ; 97.028,84.562 ccw(c98.532,84.562) AVR.38@97.469,83.499 ; 97.028,84.562 ccw(c98.532,84.562) AVR.38@97.469,83.499 ; 97.028,84.562 ccw(c98.532,84.562) AVR.38@97.469,83.499 ; 97.028,86.38 cw(c98.532,86.38) PA0~PA7.3@97.469,87.443 ; 97.028,86.38 cw(c98.532,86.38) PA0~PA7.3@97.469,87.443 ; 97.028,86.38 cw(c98.532,86.38) PA0~PA7.3@97.469,87.443 ; 97.028,86.38 cw(c98.532,86.38) PA0~PA7.3@97.469,87.443 ; 97.028,86.38 cw(c98.532,86.38) PA0~PA7.3@97.469,87.443 ; 97.028,86.38 cw(c98.532,86.38) PA0~PA7.3@97.469,87.443 ; 97.028,86.38 cw(c98.532,86.38) PA0~PA7.3@97.469,87.443 ; 97.028,86.993 cw(c97.919,86.993) PA0~PA7.3@97.289,87.623 ; 97.028,86.993 cw(c97.919,86.993) PA0~PA7.3@97.289,87.623 ; 97.028,86.993 cw(c97.919,86.993) PA0~PA7.3@97.289,87.623 ; 97.028,86.993 cw(c97.919,86.993) PA0~PA7.3@97.289,87.623 ; 97.028,86.993 cw(c97.919,86.993) PA0~PA7.3@97.289,87.623 ; 97.028,86.993 cw(c97.919,86.993) PA0~PA7.3@97.289,87.623 ; 97.028,86.993 cw(c97.919,86.993) PA0~PA7.3@97.289,87.623 ; 97.028,88.775 ccw(c97.919,88.775) PA0~PA7.3@97.289,88.145 ; 97.028,88.775 ccw(c97.919,88.775) PA0~PA7.3@97.289,88.145 ; 97.028,88.775 ccw(c97.919,88.775) PA0~PA7.3@97.289,88.145 ; 97.028,88.775 ccw(c97.919,88.775) PA0~PA7.3@97.289,88.145 ; 97.028,88.775 ccw(c97.919,88.775) PA0~PA7.3@97.289,88.145 ; 97.028,88.775 ccw(c97.919,88.775) PA0~PA7.3@97.289,88.145 ; 97.028,88.775 ccw(c97.919,88.775) PA0~PA7.3@97.289,88.145 ; 97.028,89.388 ccw(c98.532,89.388) PA0~PA7.3@97.469,88.325 ; 97.028,89.388 ccw(c98.532,89.388) PA0~PA7.3@97.469,88.325 ; 97.028,89.388 ccw(c98.532,89.388) PA0~PA7.3@97.469,88.325 ; 97.028,89.388 ccw(c98.532,89.388) PA0~PA7.3@97.469,88.325 ; 97.028,89.388 ccw(c98.532,89.388) PA0~PA7.3@97.469,88.325 ; 97.028,89.388 ccw(c98.532,89.388) PA0~PA7.3@97.469,88.325 ; 97.028,89.388 ccw(c98.532,89.388) PA0~PA7.3@97.469,88.325 ; D1.4@101.413,95.317 cw(c100.35,94.254) 101.854,94.254 ; D1.4@101.413,95.317 cw(c100.35,94.254) 101.854,94.254 ; D1.4@101.413,95.317 cw(c100.35,94.254) 101.854,94.254 ; D1.4@101.413,95.317 cw(c100.35,94.254) 101.854,94.254 ; D1.4@101.413,95.317 cw(c100.35,94.254) 101.854,94.254 ; D1.4@101.413,95.317 cw(c100.35,94.254) 101.854,94.254 ; D1.4@101.413,95.317 cw(c100.35,94.254) 101.854,94.254 ; D1.4@101.593,95.497 cw(c100.963,94.867) 101.854,94.867 ; D1.4@101.593,95.497 cw(c100.963,94.867) 101.854,94.867 ; D1.4@101.593,95.497 cw(c100.963,94.867) 101.854,94.867 ; D1.4@101.593,95.497 cw(c100.963,94.867) 101.854,94.867 ; D1.4@101.593,95.497 cw(c100.963,94.867) 101.854,94.867 ; D1.4@101.593,95.497 cw(c100.963,94.867) 101.854,94.867 ; D1.4@101.593,95.497 cw(c100.963,94.867) 101.854,94.867 ; 101.854,94.254 cw(c103.358,94.254) D1.4@102.295,95.317 ; 101.854,94.254 cw(c103.358,94.254) D1.4@102.295,95.317 ; 101.854,94.254 cw(c103.358,94.254) D1.4@102.295,95.317 ; 101.854,94.254 cw(c103.358,94.254) D1.4@102.295,95.317 ; 101.854,94.254 cw(c103.358,94.254) D1.4@102.295,95.317 ; 101.854,94.254 cw(c103.358,94.254) D1.4@102.295,95.317 ; 101.854,94.254 cw(c103.358,94.254) D1.4@102.295,95.317 ; 101.854,94.867 cw(c102.745,94.867) D1.4@102.115,95.497 ; 101.854,94.867 cw(c102.745,94.867) D1.4@102.115,95.497 ; 101.854,94.867 cw(c102.745,94.867) D1.4@102.115,95.497 ; 101.854,94.867 cw(c102.745,94.867) D1.4@102.115,95.497 ; 101.854,94.867 cw(c102.745,94.867) D1.4@102.115,95.497 ; 101.854,94.867 cw(c102.745,94.867) D1.4@102.115,95.497 ; 101.854,94.867 cw(c102.745,94.867) D1.4@102.115,95.497 ; D2.4@114.113,95.317 cw(c113.05,94.254) 114.554,94.254 ; D2.4@114.113,95.317 cw(c113.05,94.254) 114.554,94.254 ; D2.4@114.113,95.317 cw(c113.05,94.254) 114.554,94.254 ; D2.4@114.113,95.317 cw(c113.05,94.254) 114.554,94.254 ; D2.4@114.113,95.317 cw(c113.05,94.254) 114.554,94.254 ; D2.4@114.113,95.317 cw(c113.05,94.254) 114.554,94.254 ; D2.4@114.113,95.317 cw(c113.05,94.254) 114.554,94.254 ; D2.4@114.293,95.497 cw(c113.663,94.867) 114.554,94.867 ; D2.4@114.293,95.497 cw(c113.663,94.867) 114.554,94.867 ; D2.4@114.293,95.497 cw(c113.663,94.867) 114.554,94.867 ; D2.4@114.293,95.497 cw(c113.663,94.867) 114.554,94.867 ; D2.4@114.293,95.497 cw(c113.663,94.867) 114.554,94.867 ; D2.4@114.293,95.497 cw(c113.663,94.867) 114.554,94.867 ; D2.4@114.293,95.497 cw(c113.663,94.867) 114.554,94.867 ; 114.554,94.254 cw(c116.058,94.254) D2.4@114.995,95.317 ; 114.554,94.254 cw(c116.058,94.254) D2.4@114.995,95.317 ; 114.554,94.254 cw(c116.058,94.254) D2.4@114.995,95.317 ; 114.554,94.254 cw(c116.058,94.254) D2.4@114.995,95.317 ; 114.554,94.254 cw(c116.058,94.254) D2.4@114.995,95.317 ; 114.554,94.254 cw(c116.058,94.254) D2.4@114.995,95.317 ; 114.554,94.254 cw(c116.058,94.254) D2.4@114.995,95.317 ; 114.554,94.867 cw(c115.445,94.867) D2.4@114.815,95.497 ; 114.554,94.867 cw(c115.445,94.867) D2.4@114.815,95.497 ; 114.554,94.867 cw(c115.445,94.867) D2.4@114.815,95.497 ; 114.554,94.867 cw(c115.445,94.867) D2.4@114.815,95.497 ; 114.554,94.867 cw(c115.445,94.867) D2.4@114.815,95.497 ; 114.554,94.867 cw(c115.445,94.867) D2.4@114.815,95.497 ; 114.554,94.867 cw(c115.445,94.867) D2.4@114.815,95.497 ; D4.4@126.813,95.317 cw(c125.75,94.254) 127.254,94.254 ; D4.4@126.813,95.317 cw(c125.75,94.254) 127.254,94.254 ; D4.4@126.813,95.317 cw(c125.75,94.254) 127.254,94.254 ; D4.4@126.813,95.317 cw(c125.75,94.254) 127.254,94.254 ; D4.4@126.813,95.317 cw(c125.75,94.254) 127.254,94.254 ; D4.4@126.813,95.317 cw(c125.75,94.254) 127.254,94.254 ; D4.4@126.813,95.317 cw(c125.75,94.254) 127.254,94.254 ; D4.4@126.993,95.497 cw(c126.363,94.867) 127.254,94.867 ; D4.4@126.993,95.497 cw(c126.363,94.867) 127.254,94.867 ; D4.4@126.993,95.497 cw(c126.363,94.867) 127.254,94.867 ; D4.4@126.993,95.497 cw(c126.363,94.867) 127.254,94.867 ; D4.4@126.993,95.497 cw(c126.363,94.867) 127.254,94.867 ; D4.4@126.993,95.497 cw(c126.363,94.867) 127.254,94.867 ; D4.4@126.993,95.497 cw(c126.363,94.867) 127.254,94.867 ; 127.254,94.254 cw(c128.758,94.254) D4.4@127.695,95.317 ; 127.254,94.254 cw(c128.758,94.254) D4.4@127.695,95.317 ; 127.254,94.254 cw(c128.758,94.254) D4.4@127.695,95.317 ; 127.254,94.254 cw(c128.758,94.254) D4.4@127.695,95.317 ; 127.254,94.254 cw(c128.758,94.254) D4.4@127.695,95.317 ; 127.254,94.254 cw(c128.758,94.254) D4.4@127.695,95.317 ; 127.254,94.254 cw(c128.758,94.254) D4.4@127.695,95.317 ; 127.254,94.867 cw(c128.145,94.867) D4.4@127.515,95.497 ; 127.254,94.867 cw(c128.145,94.867) D4.4@127.515,95.497 ; 127.254,94.867 cw(c128.145,94.867) D4.4@127.515,95.497 ; 127.254,94.867 cw(c128.145,94.867) D4.4@127.515,95.497 ; 127.254,94.867 cw(c128.145,94.867) D4.4@127.515,95.497 ; 127.254,94.867 cw(c128.145,94.867) D4.4@127.515,95.497 ; 127.254,94.867 cw(c128.145,94.867) D4.4@127.515,95.497 ; D3.4@139.513,95.317 cw(c138.45,94.254) 139.954,94.254 ; D3.4@139.513,95.317 cw(c138.45,94.254) 139.954,94.254 ; D3.4@139.513,95.317 cw(c138.45,94.254) 139.954,94.254 ; D3.4@139.513,95.317 cw(c138.45,94.254) 139.954,94.254 ; D3.4@139.513,95.317 cw(c138.45,94.254) 139.954,94.254 ; D3.4@139.513,95.317 cw(c138.45,94.254) 139.954,94.254 ; D3.4@139.513,95.317 cw(c138.45,94.254) 139.954,94.254 ; D3.4@139.693,95.497 cw(c139.063,94.867) 139.954,94.867 ; D3.4@139.693,95.497 cw(c139.063,94.867) 139.954,94.867 ; D3.4@139.693,95.497 cw(c139.063,94.867) 139.954,94.867 ; D3.4@139.693,95.497 cw(c139.063,94.867) 139.954,94.867 ; D3.4@139.693,95.497 cw(c139.063,94.867) 139.954,94.867 ; D3.4@139.693,95.497 cw(c139.063,94.867) 139.954,94.867 ; D3.4@139.693,95.497 cw(c139.063,94.867) 139.954,94.867 ; 139.954,94.254 cw(c141.458,94.254) D3.4@140.395,95.317 ; 139.954,94.254 cw(c141.458,94.254) D3.4@140.395,95.317 ; 139.954,94.254 cw(c141.458,94.254) D3.4@140.395,95.317 ; 139.954,94.254 cw(c141.458,94.254) D3.4@140.395,95.317 ; 139.954,94.254 cw(c141.458,94.254) D3.4@140.395,95.317 ; 139.954,94.254 cw(c141.458,94.254) D3.4@140.395,95.317 ; 139.954,94.254 cw(c141.458,94.254) D3.4@140.395,95.317 ; 139.954,94.867 cw(c140.845,94.867) D3.4@140.215,95.497 ; 139.954,94.867 cw(c140.845,94.867) D3.4@140.215,95.497 ; 139.954,94.867 cw(c140.845,94.867) D3.4@140.215,95.497 ; 139.954,94.867 cw(c140.845,94.867) D3.4@140.215,95.497 ; 139.954,94.867 cw(c140.845,94.867) D3.4@140.215,95.497 ; 139.954,94.867 cw(c140.845,94.867) D3.4@140.215,95.497 ; 139.954,94.867 cw(c140.845,94.867) D3.4@140.215,95.497